# EAGLE board DorMouse-clean-grouped (EAGLE 6.3)
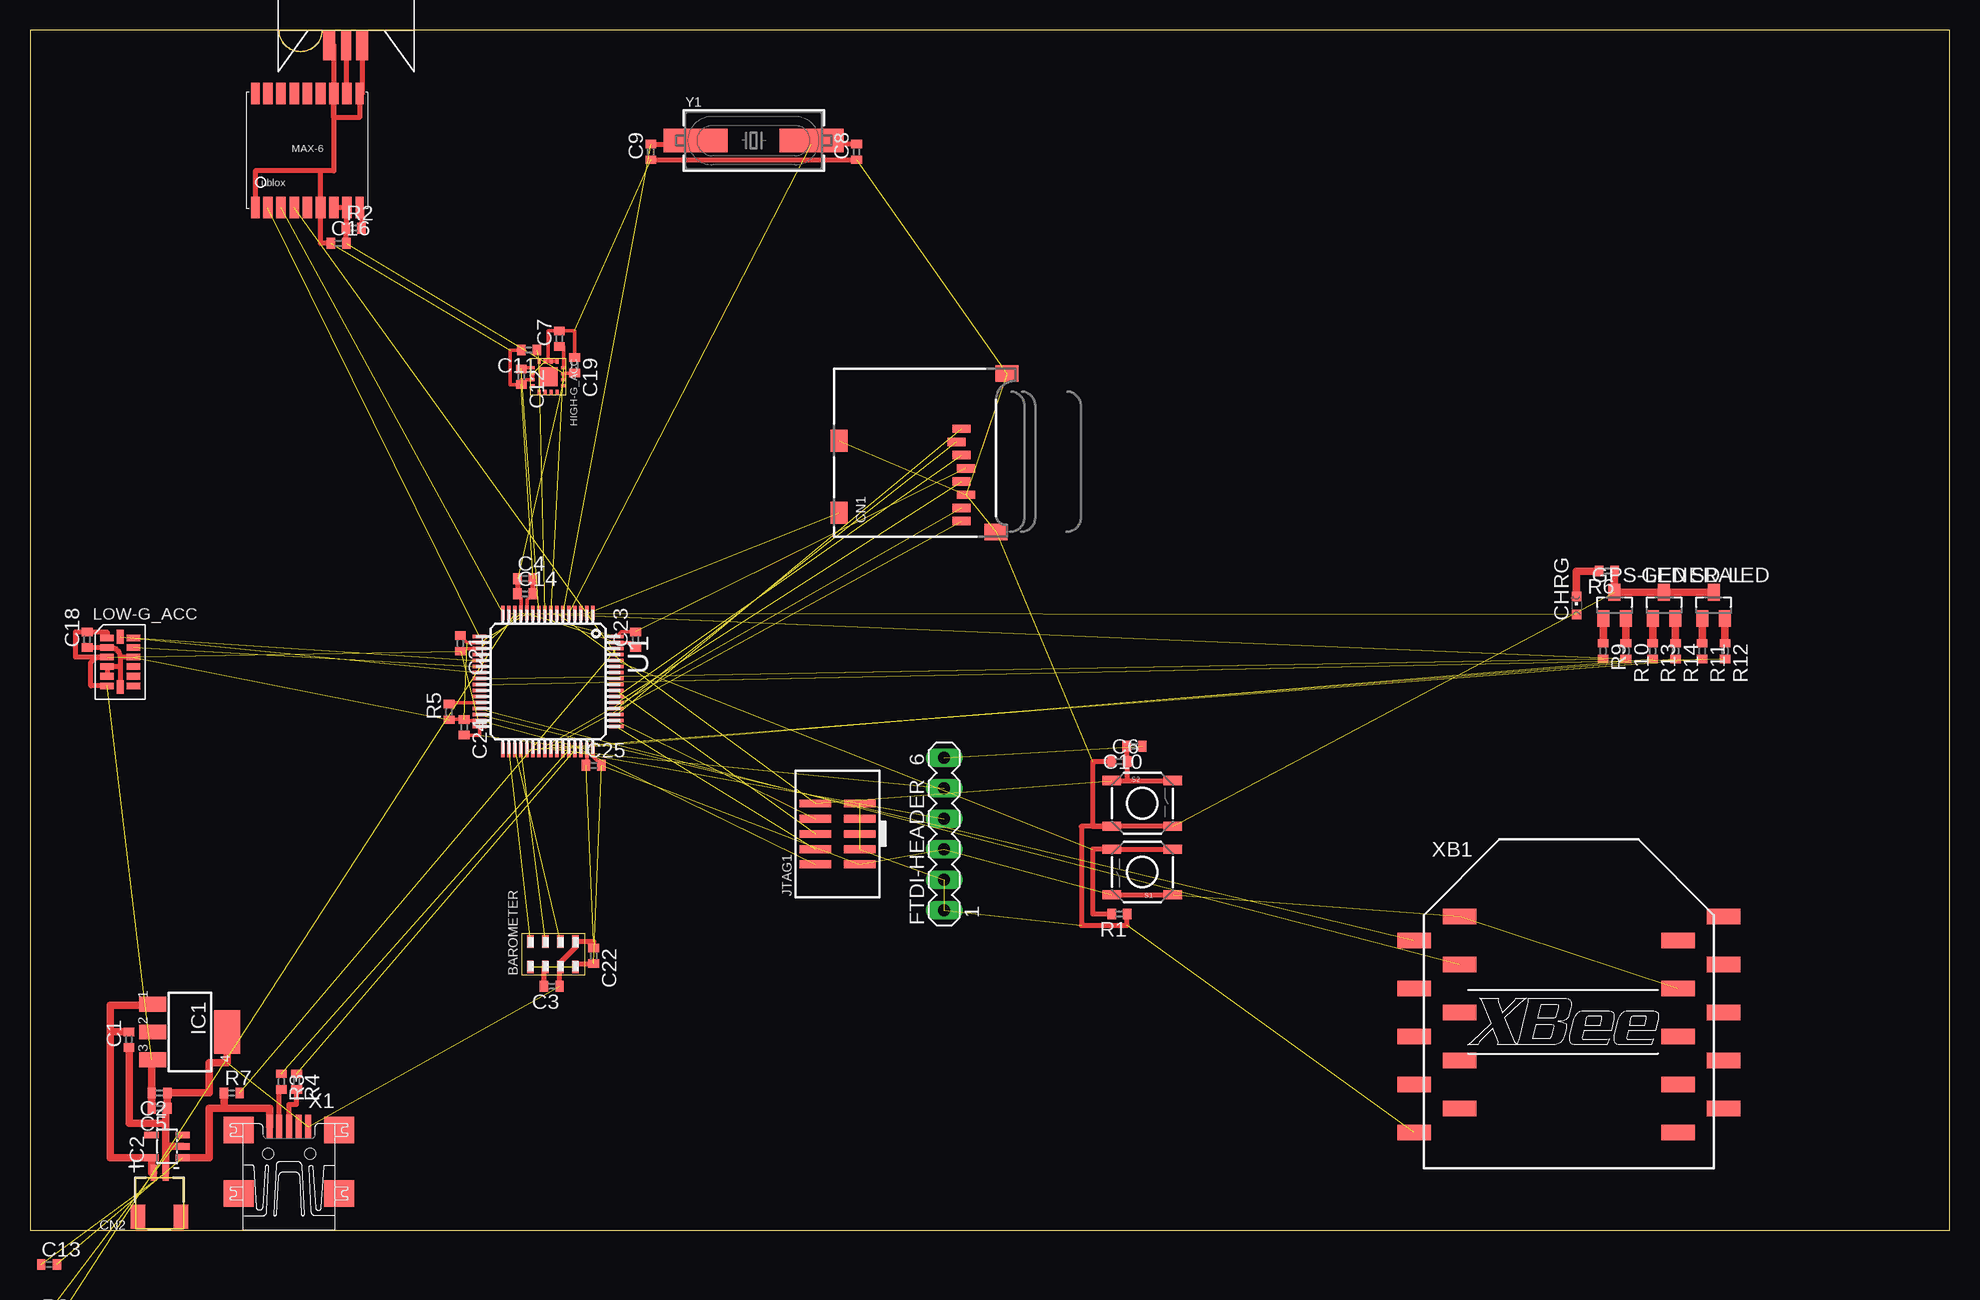
[diagram p0: board, top side]
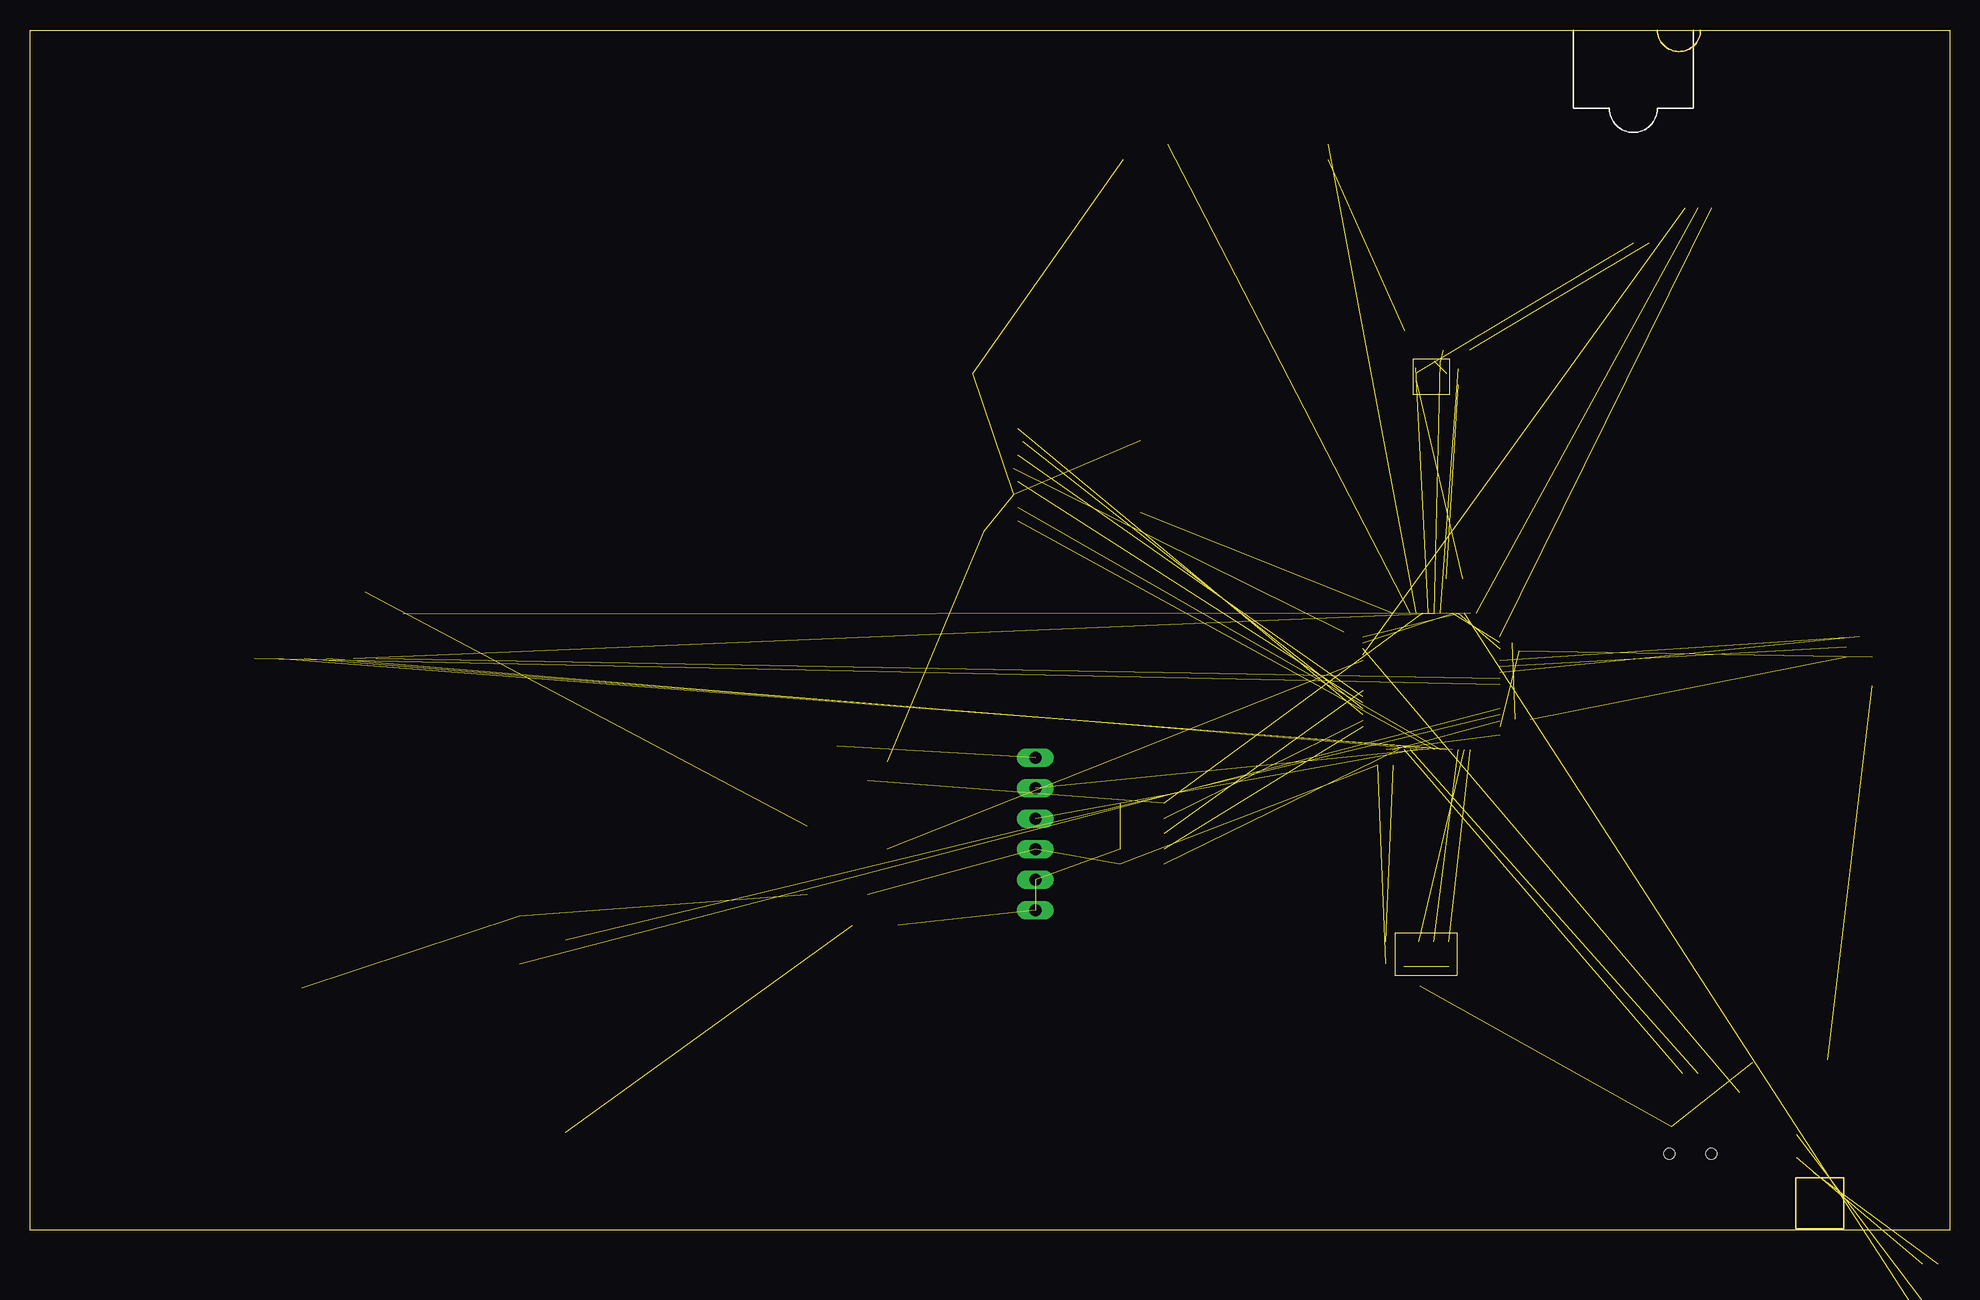
[diagram p1: board, bottom side, seen from below]

Size 160 x 100.01 mm. Coordinates in mm from the lower left corner, seen from the top.
Outline: 0,0 160,0 160,100 0,100 0,0
Copper layers (1*16): Top 0.035mm / dielectric 1.5mm / Bottom 0.035mm
Design rules "default": minimum track width 10mil, minimum drill 24mil, track to track 8mil, track to pad 8mil, pad to pad 8mil, via to via 8mil, smd to smd 8mil, copper to edge 40mil, drill to drill 8mil, minimum pad ring 10mil, minimum via ring 8mil, stop-mask expansion 4mil, vias tented up to drill 0mil, thermal gap 10mil

## Footprints (pad centres in the part's own frame; a part is rotated, then mirrored left to right if it is on the bottom)
LGA-8 = smd 1.05 x 0.55: 1 0.35,4; 2 0.35,2.75; 3 0.35,1.5; 4 0.35,0.25; 5 2.45,0.25; 6 2.45,1.5; 7 2.45,2.75; 8 2.45,4
C0402 = smd 0.7 x 0.9: 1 -0.65,0; 2 0.65,0
CHIPLED_0603 = smd 0.8 x 0.8: A 0,-0.75; C 0,0.75
MICROSD = smd 0.7 x 1.5: 1 9,-10.64; 2 7.9,-10.24; 3 6.8,-10.64; 4 5.7,-11.04; 5 4.6,-10.64; 6 3.5,-11.04; 7 2.4,-10.64; 8 1.3,-10.64 | smd 1.8 x 1.4: CD1 2,-0.44; CD2 8,-0.44 | smd 1.4 x 1.9: MT1 0.4,-13.54; MT2 13.6,-14.44
JSTSH2 = smd 0.5 x 1.35: 1 -0.5,-2.55; 2 0.5,-2.55 | smd 1.2 x 2: NC1 -1.8,1.125; NC2 1.8,1.125
MA06-1 = drill 1.016 long: 1 -6.35,0; 2 -3.81,0; 3 -1.27,0; 4 1.27,0; 5 3.81,0; 6 6.35,0
SOT23 = smd 1 x 1.4: 1 -0.95,-1.1; 2 0.95,-1.1; 3 0,1.1
UBLOX_MAX-6 = smd 1.8 x 0.7: 1_GND 4.95,-4.4; 9_V_RESET 4.95,4.3; 10_GND -4.55,4.3; 18_RESERVED -4.55,-4.4 | smd 1.8 x 0.8: 2_TXD1 4.95,-3.35; 3_RXD1 4.95,-2.25; 4_TIMEPULSE 4.95,-1.15; 5_EXTINT0 4.95,-0.05; 6_V_BCKP 4.95,1.05; 7_VCC_IO 4.95,2.15; 8_VCC 4.95,3.25; 11_RF_IN -4.55,3.25; 12_GND -4.55,2.15; 13_ANTON -4.55,1.05; 14_VCC_RF -4.55,-0.05; 15_RESERVED -4.55,-1.15; 16_SDA2 -4.55,-2.25; 17_SCL2 -4.55,-3.35
LFCSP-16 = smd 0.4 x 0.25: 1 -1.3,0.75; 2 -1.3,0.25; 3 -1.3,-0.25; 4 -1.3,-0.75; 9 1.3,-0.75; 10 1.3,-0.25; 11 1.3,0.25; 12 1.3,0.75 | smd 0.25 x 0.4: 5 -0.75,-1.3; 6 -0.25,-1.3; 7 0.25,-1.3; 8 0.75,-1.3; 13 0.75,1.3; 14 0.25,1.3; 15 -0.25,1.3; 16 -0.75,1.3 | smd 1.6 x 1.6: NC 0,0
SOT223 = smd 1.219 x 2.235: 1 -2.311,-3.099; 2 0,-3.099; 3 2.311,-3.099 | smd 3.6 x 2.2: 4 0,3.099
SOT23-5L = smd 0.55 x 1.2: 1 -0.95,-1.3; 2 0,-1.3; 3 0.95,-1.3; 4 0.95,1.3; 5 -0.95,1.3
2X05_1.27MM_SMT = smd 0.65 x 2.6: 1 -2.54,-1.85; 2 -2.54,1.85; 3 -1.27,-1.85; 4 -1.27,1.85; 5 0,-1.85; 6 0,1.85; 7 1.27,-1.85; 8 1.27,1.85; 9 2.54,-1.85; 10 2.54,1.85
LGA-14 = smd 1.145 x 0.55: 1 -1.2,1.1; 2 -1.2,0.3; 3 -1.2,-0.5; 4 -1.2,-1.3; 5 -1.2,-2.1; 6 -1.2,-2.9; 8 1,-2.9; 9 1,-2.1; 10 1,-1.3; 11 1,-0.5; 12 1,0.3; 13 0.995,1.1 | smd 0.55 x 1.145: 7 -0.1,-3; 14 -0.1,1.2
R0402 = smd 0.7 x 0.9: 1 -0.65,0; 2 0.65,0
TACTILE_SWITCH_SMD = smd 1.524 x 0.762: 1 -2.54,1.905; 2 2.54,1.905; 3 -2.54,-1.905; 4 2.54,-1.905
TQFP64 = smd 1.2 x 0.3: 1 -5.7,3.75; 2 -5.7,3.25; 3 -5.7,2.75; 4 -5.7,2.25; 5 -5.7,1.75; 6 -5.7,1.25; 7 -5.7,0.75; 8 -5.7,0.25; 9 -5.7,-0.25; 10 -5.7,-0.75; 11 -5.7,-1.25; 12 -5.7,-1.75; 13 -5.7,-2.25; 14 -5.7,-2.75; 15 -5.7,-3.25; 16 -5.7,-3.75; 33 5.7,-3.75; 34 5.7,-3.25; 35 5.7,-2.75; 36 5.7,-2.25; 37 5.7,-1.75; 38 5.7,-1.25; 39 5.7,-0.75; 40 5.7,-0.25; 41 5.7,0.25; 42 5.7,0.75; 43 5.7,1.25; 44 5.7,1.75; 45 5.7,2.25; 46 5.7,2.75; 47 5.7,3.25; 48 5.7,3.75 | smd 0.3 x 1.2: 17 -3.75,-5.7; 18 -3.25,-5.7; 19 -2.75,-5.7; 20 -2.25,-5.7; 21 -1.75,-5.7; 22 -1.25,-5.7; 23 -0.75,-5.7; 24 -0.25,-5.7; 25 0.25,-5.7; 26 0.75,-5.7; 27 1.25,-5.7; 28 1.75,-5.7; 29 2.25,-5.7; 30 2.75,-5.7; 31 3.25,-5.7; 32 3.75,-5.7; 49 3.75,5.7; 50 3.25,5.7; 51 2.75,5.7; 52 2.25,5.7; 53 1.75,5.7; 54 1.25,5.7; 55 0.75,5.7; 56 0.25,5.7; 57 -0.25,5.7; 58 -0.75,5.7; 59 -1.25,5.7; 60 -1.75,5.7; 61 -2.25,5.7; 62 -2.75,5.7; 63 -3.25,5.7; 64 -3.75,5.7
SARANTEL-SR1202 = smd 2.5 x 0.8: FEED 0,0 | smd 2.5 x 1: GND1 0,1.4; GND2 0,-1.35
UX60-MB-5ST = smd 2 x 0.5: 1 2.25,1.6; 2 2.25,0.8; 3 2.25,0; 4 2.25,-0.8; 5 2.25,-1.6 | smd 2.2 x 2.5: M1 -3.3,-4.2; M2 -3.3,4.2; M3 2,4.2; M4 2,-4.2 | hole 0.9: 0,-1.75; 0,1.75
XBEE = smd 2.8 x 1.27: P$1 -9.092,9; P$2 -12.908,7; P$3 -9.092,5; P$4 -12.908,3; P$5 -9.092,1; P$6 -12.908,-1; P$7 -9.092,-3; P$8 -12.908,-5; P$9 -9.092,-7; P$10 -12.908,-9; P$11 12.908,9; P$12 9.092,7; P$13 12.908,5; P$14 9.092,3; P$15 12.908,1; P$16 9.092,-1; P$17 12.908,-3; P$18 9.092,-5; P$19 12.908,-7; P$20 9.092,-9
HC49UP = smd 5.334 x 1.93: 1 -4.826,0; 2 4.826,0

## Placement (x,y rotation side)
BAROMETER  MPL115A1  [LGA-8]  45.72,21.59 90 top
C1  0.22uF  [C0402]  8.26,15.88 90 top
C2  0.1uF  [C0402]  10.79,11.43 180 top
C3  1uF  [C0402]  43.5,20.32 180 top
C4  10nF  [C0402]  41.27,54.29 0 top
C5  4.7uF  [C0402]  10.79,10.16 180 top
C6  0.1uF  [C0402]  90.81,39.05 0 top
C7  0.01uF  [C0402]  44.13,74.3 90 top
C8  22pf  [C0402]  68.9,89.85 90 top
C9  22pf  [C0402]  51.75,89.85 90 top
C10  1uF  [C0402]  92.08,40.32 180 top
C11  0.01uF  [C0402]  41.59,73.34 180 top
C12  0.01uF  [C0402]  40.96,71.12 270 top
C13  1uF  [C0402]  1.59,-2.86 0 top
C14  1uF  [C0402]  41.27,53.02 0 top
C16  0.1uF  [C0402]  25.72,82.23 0 top
C18  0.1uF  [C0402]  4.76,49.21 90 top
C19  0.1uF  [C0402]  45.4,72.07 270 top
C21  0.1uF  [C0402]  35.88,48.9 270 top
C22  0.1uF  [C0402]  46.99,22.86 270 top
C23  0.1uF  [C0402]  50.48,49.21 90 top
C24  0.1uF  [C0402]  36.2,41.91 270 top
C25  0.1uF  [C0402]  46.99,38.73 0 top
CHRG  [CHIPLED_0603]  128.91,52.07 0 top
CN1  [MICROSD]  66.99,57.78 90 top
CN2  [JSTSH2]  10.79,2.22 180 top
FTDI-HEADER  [MA06-1]  76.2,33.02 90 top
GENERAL  RED-GREEN_LED  [SOT23]  136.21,52.07 0 top
GPS  UBLOX_MAX-6  [UBLOX_MAX-6]  23.18,90.17 270 top
GPS-LED  RED-GREEN_LED  [SOT23]  132.08,52.07 0 top
HIGH-G_ACC  ADXL377  [LFCSP-16]  43.18,71.12 270 top
IC1  LM340MP-05  [SOT223]  13.34,16.51 270 top
IC2  MAX1551  [SOT23-5L]  11.43,6.99 90 top
JTAG1  [2X05_1.27MM_SMT]  67.31,33.02 90 top
LOW-G_ACC  ADXL345  [LGA-14]  7.62,48.26 0 top
R1  10k  [R0402]  90.81,26.35 180 top
R2  3k3  [R0402]  26.99,83.5 0 top
R3  22  [R0402]  20.95,12.38 270 top
R4  22  [R0402]  22.23,12.38 270 top
R5  10k  [R0402]  34.92,43.18 90 top
R6  160  [R0402]  131.44,54.93 180 top
R7  10k  [R0402]  16.83,11.43 0 top
R8  100k  [R0402]  1.59,-7.62 0 top  (outside the outline)
R9  160  [R0402]  131.13,48.26 270 top
R10  160  [R0402]  133.03,48.26 270 top
R11  160  [R0402]  139.38,48.26 270 top
R12  160  [R0402]  141.29,48.26 270 top
R13  160  [R0402]  135.25,48.26 270 top
R14  160  [R0402]  137.16,48.26 270 top
S1  [TACTILE_SWITCH_SMD]  92.71,29.84 180 top
S2  [TACTILE_SWITCH_SMD]  92.71,35.56 0 top
SD-LED  RED-GREEN_LED  [SOT23]  140.34,52.07 0 top
U1  STM32F10XRXT6  [TQFP64]  43.18,45.72 270 top
U$1  SARANTEL-SR1202  [SARANTEL-SR1202]  26.35,98.74 90 top
X1  MINI-USB-UX60-MB-5ST  [UX60-MB-5ST]  21.59,6.35 90 top
XB1  XBEE  [XBEE]  128.27,17.14 0 top
Y1  [HC49UP]  60.33,90.81 0 top

## Library data of the parts
BAROMETER HIGH-G_ACC LOW-G_ACC = Swallow
C1-C14 C16 C18 C19 C21-C25 R1-R14 = rcl
CHRG = led
CN1 CN2 JTAG1 Y1 = microbuilder
FTDI-HEADER = con-lstb; OC_FARNELL: unknown; OC_NEWARK: unknown
GENERAL GPS-LED SD-LED = DorMouse
GPS U$1 = Ava
IC1 = linear
IC2 = maxim; MF: MAXIM; MPN: MAX1551EZK-T; OC_FARNELL: 1628221; OC_NEWARK: 88H0599
S1 S2 = SparkFun
U1 = stm32
X1 = con-hirose; OC_FARNELL: unknown; OC_NEWARK: unknown
XB1 = Swallow; MPN: XBP24-Z7UIT-004; OC_FARNELL: 1751799; OC_NEWARK: 34R5507

## Nets
ACC-INT1: LOW-G_ACC.8
ACC-INT2: LOW-G_ACC.9
ADC1: C7.1 HIGH-G_ACC.16 U1.8
ADC2: C11.1 HIGH-G_ACC.4 U1.9
ADC3: C12.1 HIGH-G_ACC.5 U1.10
BOOT1: R5.2 U1.28
CHARGING(-): R8.2 U1.14
GENERAL_HAPPY_FACE: R14.2 U1.38
GND: BAROMETER.3 BAROMETER.5 C1.1 C2.1 C3.1 C4.2 C5.1 C6.1 C7.2 C8.1 C9.1 C11.2 C12.2 C13.1 C14.2 C16.1 C18.1 C19.1 C21.1 C22.1 C23.1 C24.1 C25.1 CN1.6 CN1.CD2 CN1.MT1 CN1.MT2 CN2.1 FTDI-HEADER.1 FTDI-HEADER.2 GENERAL.3 GPS-LED.3 GPS.1_GND GPS.6_V_BCKP GPS.10_GND GPS.12_GND HIGH-G_ACC.1 HIGH-G_ACC.2 HIGH-G_ACC.3 HIGH-G_ACC.6 HIGH-G_ACC.7 IC1.4 IC2.2 JTAG1.3 JTAG1.5 JTAG1.9 LOW-G_ACC.2 LOW-G_ACC.4 LOW-G_ACC.5 LOW-G_ACC.7 LOW-G_ACC.11 R1.1 R5.1 R6.1 S2.3 S2.4 SD-LED.3 U1.12 U1.18 U1.31 U1.47 U1.63 U$1.GND1 U$1.GND2 X1.5 XB1.P$10
GPS_:(: R9.2 U1.24
GPS_:): R10.2 U1.11
LIPO+: C1.2 CN2.2 IC1.1 IC2.5
MISO-1: LOW-G_ACC.12 U1.22
MISO-2: BAROMETER.6 U1.35
MISO-3: U1.56
MOSI-1: LOW-G_ACC.13 U1.21
MOSI-2: BAROMETER.7 U1.36
MOSI-3: U1.57
N$1: GPS.16_SDA2
N$2: R1.2 S1.3 S1.4 U1.60
N$3: BAROMETER.2 C3.2
N$4: GPS.5_EXTINT0
N$5: R3.1 U1.44
N$6: C9.2 U1.6 Y1.1
N$7: U1.20
N$8: R4.1 U1.45
N$9: CHRG.A U1.15
N$10: GPS.17_SCL2
N$11: LOW-G_ACC.10
N$12: CHRG.C R6.2
N$13: IC2.3 R8.1
N$14: C8.2 U1.5 Y1.2
N$15: GPS.9_V_RESET R2.2
N$16: GPS.13_ANTON
N$17: GPS-LED.1 R9.1
N$18: GPS.11_RF_IN U$1.FEED
N$19: C10.1 FTDI-HEADER.6
N$20: GPS.15_RESERVED
N$21: R7.2 U1.62
N$23: GPS.18_RESERVED
N$24: GPS.14_VCC_RF
N$27: GPS-LED.2 R10.1
N$30: R11.1 SD-LED.1
N$31: R12.1 SD-LED.2
N$33: GENERAL.1 R13.1
N$34: GENERAL.2 R14.1
RESET: C6.2 C10.2 JTAG1.10 S2.1 S2.2 U1.7
SCK-1: LOW-G_ACC.14 U1.23
SCK-2: BAROMETER.8 U1.34
SCL: U1.58
SD-CLK: CN1.5 U1.53
SD-CMD: CN1.3 U1.54
SD-DAT0: CN1.7 U1.39
SD-DAT1: CN1.8 U1.40
SD-DAT2: CN1.1 U1.51
SD-DAT3: CN1.2 U1.52
SD-DET: CN1.CD1 U1.2
SD_:(: R11.2 U1.37
SD_:): R12.2 U1.25
SDA: U1.59
SERGEANT_SAD_FACE: R13.2 U1.41
TCK: JTAG1.4 U1.49
TDI: JTAG1.8 U1.50
TDO: JTAG1.6 U1.55
TIMEPULSE: GPS.4_TIMEPULSE U1.61
TMS: JTAG1.2 U1.46
U1-RX: FTDI-HEADER.4 U1.43
U1-TX: FTDI-HEADER.5 U1.42
U2-RX: GPS.2_TXD1 U1.17
U2-TX: GPS.3_RXD1 U1.16
U3-RX: U1.30 XB1.P$2
U3-TX: U1.29 XB1.P$3
USB-5V: C13.2 IC2.1 R7.1 X1.1
USB-DM: R3.2 X1.2
USB-DP: R4.2 X1.3
VBAT: U1.1
VCC: BAROMETER.1 BAROMETER.4 C2.2 C4.1 C5.2 C14.1 C16.2 C18.2 C19.2 C21.2 C22.2 C23.2 C24.2 C25.2 CN1.4 FTDI-HEADER.3 GPS.7_VCC_IO GPS.8_VCC HIGH-G_ACC.14 HIGH-G_ACC.15 IC1.3 JTAG1.1 LOW-G_ACC.1 LOW-G_ACC.3 LOW-G_ACC.6 R2.1 S1.1 S1.2 U1.13 U1.19 U1.32 U1.48 U1.64 XB1.P$1 XB1.P$14

## Tracks (layer width: path | path; a pad name or v marks a point on that pad's centre or on a via)
ADC1  (1 unrouted)
  Top 0.305: C7.1 44.48,73.64 HIGH-G_ACC.16
ADC2  (2 unrouted)
ADC3  (1 unrouted)
  Top 0.305: HIGH-G_ACC.5 40.96,71.87 C12.1
BOOT1
  Top 0.305: R5.2 35.06,43.97 U1.28
CHARGING(-)  (1 unrouted)
GENERAL_HAPPY_FACE  (1 unrouted)
GND  (25 unrouted)
  Top 0.305: C14.2 41.43,52.53 U1.12 | C21.1 36.45,48.97 U1.18 | U1.31 36.28,42.47 C24.1 34.95,42.56 R5.1 | C25.1 46.43,38.83 U1.47 | C23.1 50.08,48.97 U1.63 | HIGH-G_ACC.6 HIGH-G_ACC.7 40.96,70.87 C12.2 40.01,70.47 40.01,73.34 C11.2 | HIGH-G_ACC.1 HIGH-G_ACC.2 HIGH-G_ACC.3 43.18,72.42 43.18,74.93 44.13,74.93 C7.2 45.4,74.94 C19.1
  Top 0.406: C18.1 LOW-G_ACC.2 6.72,48.56 arc-90 7.52,47.76 | LOW-G_ACC.11 7.52,47.76 | 7.52,46.96 LOW-G_ACC.7 | 7.52,47.76 7.52,46.96 | 7.52,46.96 LOW-G_ACC.4 LOW-G_ACC.5 | C3.1 44.15,21.94 BAROMETER.3 44.22,22.31 45.47,23.56 BAROMETER.5 46.99,24.04 C22.1 | C14.2 C4.2 | C16.1 24.23,82.23 GPS.6_V_BCKP 24.23,88.27 | GPS.12_GND 25.33,92.71 27.48,92.71 GPS.10_GND 27.7,94.72 U$1.GND2 | GPS.12_GND 25.33,88.27 24.23,88.27 | 24.23,88.27 18.78,88.27 GPS.1_GND | U$1.GND1 25.33,98.74 GPS.12_GND | C9.1 C8.1 | S2.4 S2.3 | C6.1 88.58,39.05 88.58,33.66 S2.3 | S2.3 87.63,33.66 87.63,25.4 91.45,25.4 R1.1
  Top 0.61: CN2.1 11.29,6.99 | 11.29,6.99 IC2.2 | 11.29,8.89 11.29,10.16 C5.1 C2.1 14.92,11.43 14.92,13.97 16.43,13.97 IC1.4 | 11.29,8.89 11.29,6.99 | C1.1 8.26,8.89 11.29,8.89 | SD-LED.3 GENERAL.3 GPS-LED.3 R6.1
GPS_:(  (1 unrouted)
GPS_:)  (1 unrouted)
LIPO+
  Top 0.61: CN2.2 10.13,4.77 IC2.5 6.67,6.04 6.67,16.51 6.67,16.52 | 6.67,16.52 6.67,18.73 10.24,18.73 IC1.1 | C1.2 6.67,16.52
MISO-1  (1 unrouted)
MISO-2  (1 unrouted)
MOSI-1  (1 unrouted)
MOSI-2  (1 unrouted)
N$2  (1 unrouted)
  Top 0.406: S1.3 S1.4 88.58,31.75 88.58,26.35 R1.2
N$3
  Top 0.406: C3.2 42.85,21.94 BAROMETER.2
N$5  (1 unrouted)
N$6  (1 unrouted)
  Top 0.406: C9.2 55.5,90.5 Y1.1
N$8  (1 unrouted)
N$9  (1 unrouted)
N$12
  Top 0.61: R6.2 128.91,54.93 CHRG.C
N$13  (1 unrouted)
N$14  (1 unrouted)
  Top 0.406: C8.2 65.15,90.5 Y1.2
N$15
  Top 0.406: GPS.9_V_RESET 27.64,85.22 R2.2
N$17
  Top 0.61: GPS-LED.1 R9.1
N$18
  Top 0.406: U$1.FEED 26.35,94.72 GPS.11_RF_IN
N$19  (1 unrouted)
N$21  (1 unrouted)
N$27
  Top 0.61: GPS-LED.2 R10.1
N$30
  Top 0.61: R11.1 SD-LED.1
N$31
  Top 0.61: SD-LED.2 R12.1
N$33
  Top 0.61: GENERAL.1 R13.1
N$34
  Top 0.61: GENERAL.2 R14.1 137.16,48.9
RESET  (2 unrouted)
  Top 0.406: S2.1 91.44,37.47 | 91.44,37.47 S2.2 | 91.44,37.47 91.44,39.05 C6.2 91.42,39.05 C10.2
SCK-1  (1 unrouted)
SCK-2  (1 unrouted)
SD-CLK  (1 unrouted)
SD-CMD  (1 unrouted)
SD-DAT0  (1 unrouted)
SD-DAT1  (1 unrouted)
SD-DAT2  (1 unrouted)
SD-DAT3  (1 unrouted)
SD-DET  (1 unrouted)
SD_:(  (1 unrouted)
SD_:)  (1 unrouted)
SERGEANT_SAD_FACE  (1 unrouted)
TCK  (1 unrouted)
TDI  (1 unrouted)
TDO  (1 unrouted)
TIMEPULSE  (1 unrouted)
TMS  (1 unrouted)
U1-RX  (1 unrouted)
U1-TX  (1 unrouted)
U2-RX  (1 unrouted)
U2-TX  (1 unrouted)
U3-RX  (1 unrouted)
U3-TX  (1 unrouted)
USB-5V  (1 unrouted)
  Top 0.61: IC2.1 14.92,6.04 14.92,10.16 16.19,10.16 | 16.19,10.16 19.99,10.16 X1.1 | R7.1 16.19,11.43 16.19,10.16
USB-DM
  Top 0.406: X1.2 20.79,11.73 R3.2
USB-DP
  Top 0.406: X1.3 21.59,10.48 22.23,10.48 R4.2
VCC  (16 unrouted)
  Top 0.305: C14.1 40.93,52.72 U1.13 | C21.2 36.1,48.47 U1.19 | C24.2 37.48,41.26 U1.32 | C25.2 46.93,39.45 U1.48 | U1.64 49.27,49.86 C23.2 | C19.2 44.48,71.42 HIGH-G_ACC.15 HIGH-G_ACC.14
  Top 0.406: LOW-G_ACC.1 6.42,49.86 C18.2 3.81,49.86 3.81,47.76 LOW-G_ACC.3 5.53,47.76 5.08,47.31 5.08,45.36 LOW-G_ACC.6 | BAROMETER.4 45.47,22.21 C22.2 | C4.1 C14.1 | GPS.7_VCC_IO GPS.8_VCC 26.34,85.22 R2.1 26.34,82.23 C16.2 | S1.2 S1.1
  Top 0.61: IC1.3 10.14,14.2 C2.2 C5.2